# EAGLE board decoder (EAGLE 7.2.0)
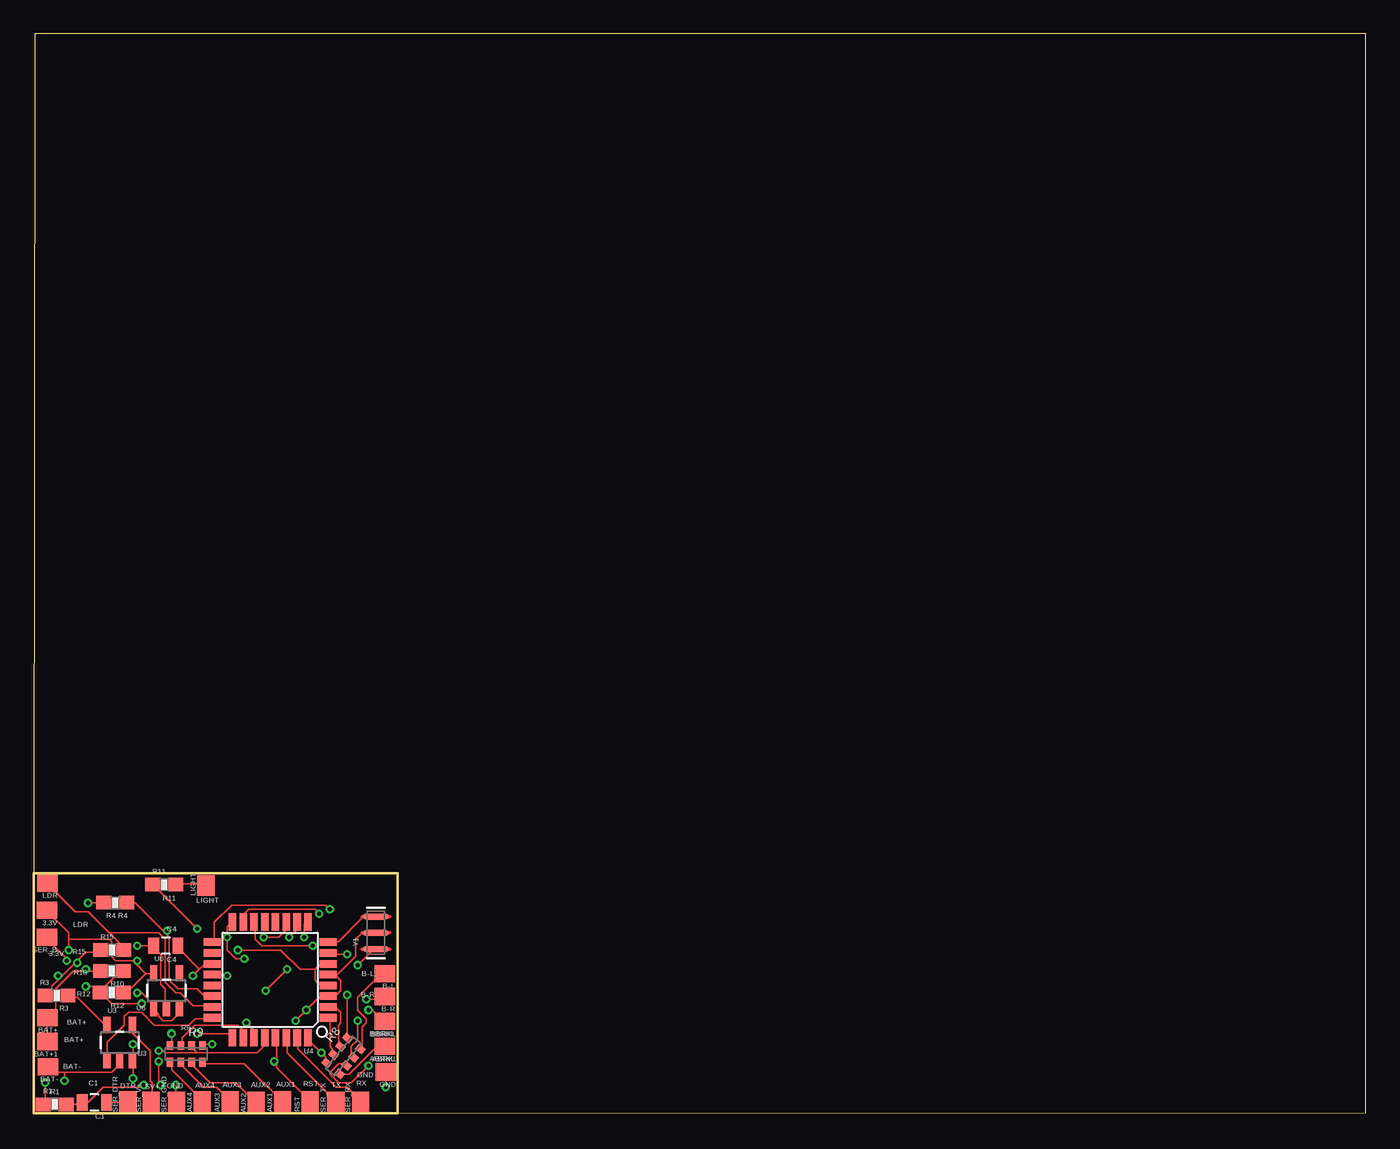
[diagram p0: board, top side]
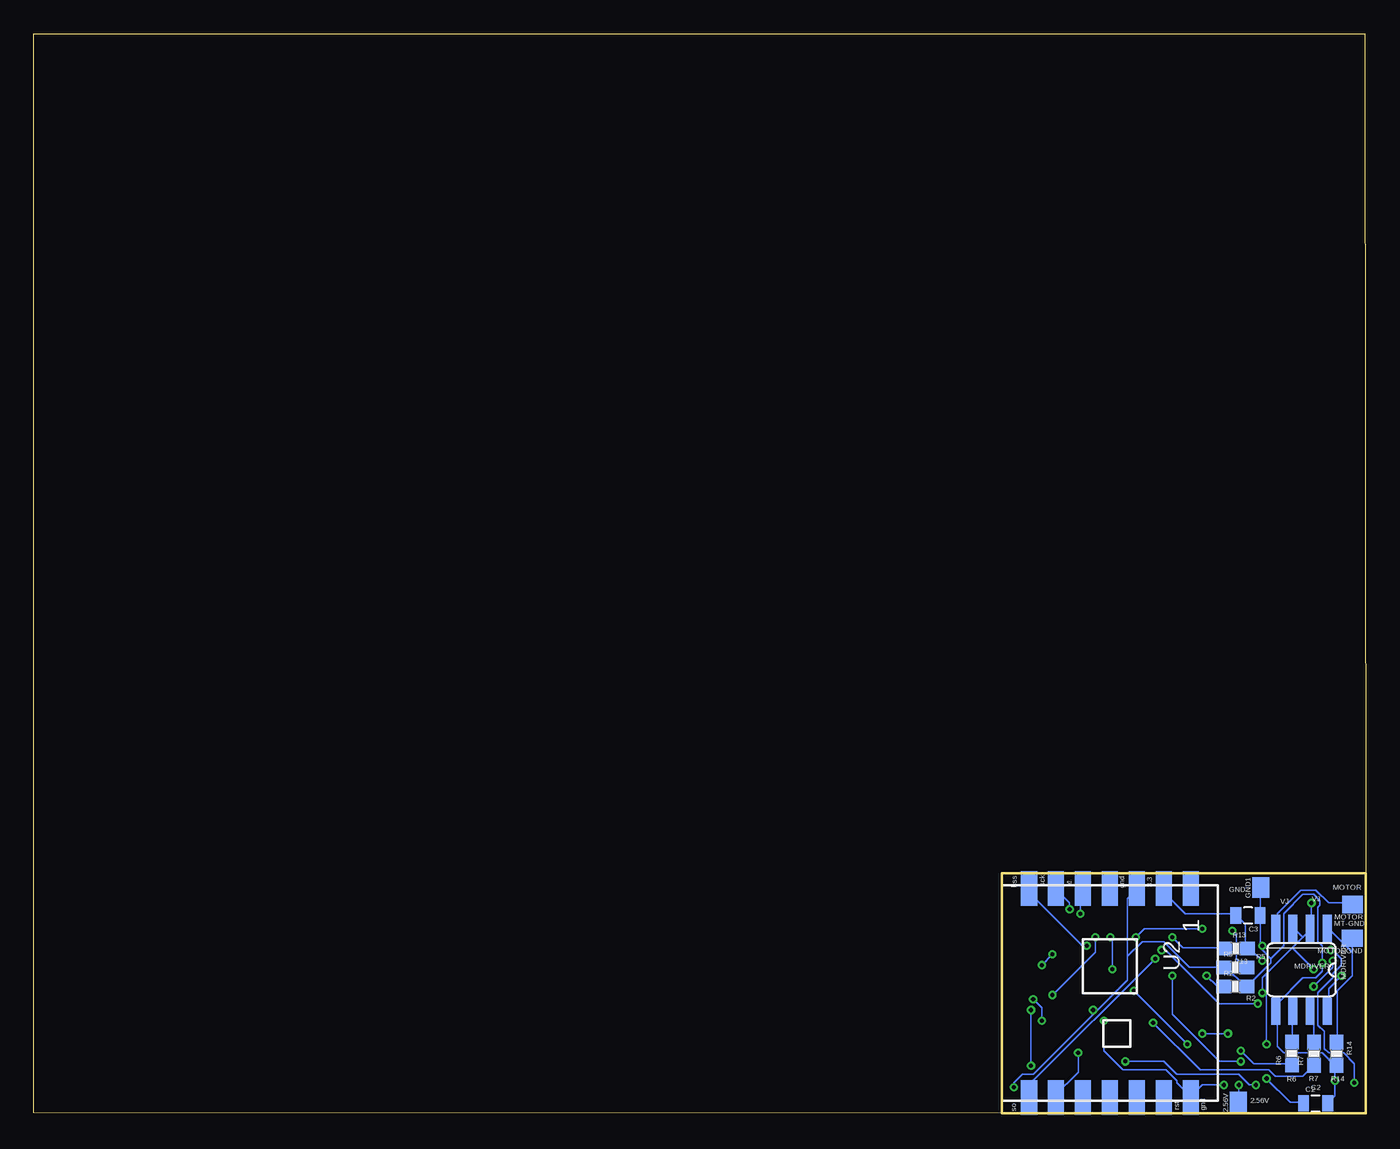
[diagram p1: board, bottom side, seen from below]

Size 98.79 x 80.04 mm. Coordinates in mm from the lower left corner, seen from the top.
Outline: 26.99,0 98.79,0.04 98.79,80.04 0.06,80.04 0.02,17.79
Outline: 0.02,17.79 26.98,17.8 26.99,0
Outline: 26.99,0 0,0.02 0.02,17.79
Copper layers (1*16): Top 0.035mm / dielectric 1.5mm / Bottom 0.035mm
Design rules "Elecrow_2-layer_eagle_rule *": minimum track width 5mil, minimum drill 12mil, track to track 6mil, track to pad 6mil, pad to pad 6mil, via to via 6mil, smd to smd 0mil, copper to edge 10mil, drill to drill 10mil, minimum pad ring 10mil, minimum via ring 6mil, stop-mask expansion 2mil, vias tented up to drill 100mil, thermal gap 10mil

## Footprints (pad centres in the part's own frame; a part is rotated, then mirrored left to right if it is on the bottom)
SMD1,27-2,54 = smd 1.27 x 1.524: 1 0,0
0805 = smd 0.8 x 1.2: 1 -0.9,0; 2 0.9,0
SO08 = smd 0.66 x 2.032: 1 -1.905,-3.073; 2 -0.635,-3.073; 3 0.635,-3.073; 4 1.905,-3.073; 5 1.905,3.073; 6 0.635,3.073; 7 -0.635,3.073; 8 -1.905,3.073
0603-RES = smd 1.1 x 1: 1 -0.85,0; 2 0.85,0
0603-ARV = smd 0.5 x 0.65: 1 -1.2,-0.625; 2 -0.4,-0.625; 3 0.4,-0.625; 4 1.2,-0.625; 5 1.2,0.625; 6 0.4,0.625; 7 -0.4,0.625; 8 -1.2,0.625
RFM69CW-XXXS2 = smd 2.543 x 1.2: 1 -7.754,6; 2 -7.754,4; 3 -7.754,2; 4 -7.754,0; 5 -7.754,-2; 6 -7.754,-4; 7 -7.754,-6; 8 7.754,-6; 9 7.754,-4; 10 7.754,-2; 11 7.754,0; 12 7.754,2; 13 7.754,4; 14 7.754,6
SOT23-5 = smd 0.55 x 1.2: 1 -0.95,-1.3; 2 0,-1.3; 3 0.95,-1.3; 4 0.95,1.3; 5 -0.95,1.3
TQFP32-08 = smd 1.27 x 0.559: 1 -4.293,2.8; 2 -4.293,2; 3 -4.293,1.2; 4 -4.293,0.4; 5 -4.293,-0.4; 6 -4.293,-1.2; 7 -4.293,-2; 8 -4.293,-2.8; 17 4.293,-2.8; 18 4.293,-2; 19 4.293,-1.2; 20 4.293,-0.4; 21 4.293,0.4; 22 4.293,1.2; 23 4.293,2; 24 4.293,2.8 | smd 0.559 x 1.27: 9 -2.8,-4.293; 10 -2,-4.293; 11 -1.2,-4.293; 12 -0.4,-4.293; 13 0.4,-4.293; 14 1.2,-4.293; 15 2,-4.293; 16 2.8,-4.293; 25 2.8,4.293; 26 2,4.293; 27 1.2,4.293; 28 0.4,4.293; 29 -0.4,4.293; 30 -1.2,4.293; 31 -2,4.293; 32 -2.8,4.293
RESONATOR-SMD = smd 0.45 x 1.905: 1 -1.2,0; 2 0,0; 3 1.2,0

## Placement (x,y rotation side)
2.56V  [SMD1,27-2,54]  9.45,0.85 0 bottom
3.3V  [SMD1,27-2,54]  1,15.05 90 top
ABRKL  [SMD1,27-2,54]  26.03,4.97 90 top
AUX1  [SMD1,27-2,54]  18.45,0.87 0 top
AUX2  [SMD1,27-2,54]  16.5,0.83 0 top
AUX3  [SMD1,27-2,54]  14.56,0.87 0 top
AUX4  [SMD1,27-2,54]  12.51,0.87 0 top
B-L  [SMD1,27-2,54]  26.04,10.35 90 top
B-R  [SMD1,27-2,54]  26.04,8.67 90 top
BAT+  [SMD1,27-2,54]  1.03,7.1 90 top
BAT+1  [SMD1,27-2,54]  1.02,5.33 90 top
BAT-  [SMD1,27-2,54]  1.07,3.46 90 top
BBRKL  [SMD1,27-2,54]  26.04,6.83 90 top
C1  0.1uF  [0805]  4.5,0.8 180 top
C2  4.7uF  [0805]  3.72,0.74 0 bottom
C3  4.7uF  [0805]  8.74,14.67 180 bottom
C4  4.7uF  [0805]  9.8,12.42 180 top
GND  [SMD1,27-2,54]  26.1,3.06 90 top
GND1  [SMD1,27-2,54]  7.79,16.73 0 bottom
LDR  [SMD1,27-2,54]  1.01,17.08 90 top
LIGHT  [SMD1,27-2,54]  12.77,16.89 0 top
MDRIVER  L9110S  [SO08]  4.77,10.64 180 bottom
MOTOR  [SMD1,27-2,54]  0.97,15.49 90 bottom
MOTORGND  [SMD1,27-2,54]  1,12.97 90 bottom
R1  10k  [0603-RES]  1.56,0.68 0 top
R2  2k2  [0603-RES]  9.67,9.4 0 bottom
R3  2K  [0603-RES]  1.7,8.74 180 top
R4  2K  [0603-RES]  6.04,15.62 180 top
R5  2K  [0603-RES]  9.67,10.82 0 bottom
R6  0  [0603-RES]  5.48,4.44 90 bottom
R7  0  [0603-RES]  3.85,4.43 90 bottom
R8  100  [0603-ARV]  22.98,4.25 230 top
R9  100  [0603-ARV]  11.31,4.41 180 top
R10  0  [0603-RES]  5.8,10.56 180 top
R11  68  [0603-RES]  9.67,16.96 0 top
R12  0  [0603-RES]  5.79,8.95 180 top
R13  10k  [0603-RES]  9.65,12.23 180 bottom
R14  0  [0603-RES]  2.17,4.42 270 bottom
R15  68  [0603-RES]  5.82,12.11 0 top
RST  [SMD1,27-2,54]  20.49,0.88 0 top
SER_B  [SMD1,27-2,54]  0.98,13.05 90 top
SER_DTR  [SMD1,27-2,54]  6.99,0.88 0 top
SER_GND  [SMD1,27-2,54]  10.61,0.85 0 top
SER_RX  [SMD1,27-2,54]  24.24,0.85 0 top
SER_TX  [SMD1,27-2,54]  22.41,0.85 0 top
SER_V+  [SMD1,27-2,54]  8.72,0.85 0 top
U2  RFM69CW  [RFM69CW-XXXS2]  18.97,8.92 270 bottom
U3  MCP73831  [SOT23-5]  6.38,5.25 0 top
U4  ATMEGA328P  [TQFP32-08]  17.54,9.89 180 top
U6  MIC5219 3.3V  [SOT23-5]  9.85,9.1 0 top
Y1  16MHZ  [RESONATOR-SMD]  25.37,13.38 90 top

## Library data of the parts
2.56V 3.3V ABRKL AUX1-AUX4 B-L B-R BAT+ BAT+1 BAT- BBRKL GND GND1 LDR LIGHT MOTOR MOTORGND RST SER_B SER_DTR SER_GND SER_RX SER_TX SER_V+ = wirepad
C1-C4 = SparkFun-Capacitors
MDRIVER = h-bridge-l9119s
R1-R15 = SparkFun-Resistors
U2 = SparkFun-RF
U3 = SparkFun-PowerIC; PROD_ID: IC-09995
U4 = SparkFun-DigitalIC; PROD_ID: IC-09069
U6 = SparkFun-PowerIC; PROD_ID: VREG-09872
Y1 = SparkFun-FreqCtrl; PROD_ID: XTAL-08900

## Nets
A0: LDR.1 R15.2 U4.23
A1: U3.1 U4.24
A2: R9.4 U4.25
A3: R9.3 U4.26
A4: R7.1 U4.27
A5: R6.1 R9.2 U4.28
A6: C4.1 R2.1 U4.19
A7: R4.1 R5.2 U4.22
ABRKL: R8.4 U2.9 U4.32
AREF: 2.56V.1 U4.20
BAT+: BAT+1.1 BAT+.1 C2.1 MDRIVER.2 MDRIVER.3 R4.2 R10.2 U3.3 U6.1 U6.3
BBRKL: R8.3 U4.1
BL: R8.1 U4.9
BR: R8.2 U4.2
D6: R9.1 U4.10
D7: R11.1 U4.11
GND: BAT-.1 C2.2 C3.1 C4.2 GND1.1 GND.1 MDRIVER.5 MDRIVER.8 R2.2 R3.2 R5.1 R14.2 R15.1 SER_GND.1 U2.3 U2.14 U3.2 U4.3 U4.5 U6.2 Y1.2
MISO: R13.2 U2.8 U4.16
MOSI: U2.5 U4.15
N$2: U4.7 Y1.1
N$3: C1.1 SER_DTR.1
N$4: U4.8 Y1.3
N$5: C1.2 R1.2 RST.1 U4.29
N$6: MDRIVER.6 R6.2
N$7: MDRIVER.7 R7.2
N$8: R10.1 R12.2 SER_B.1 U4.4 U4.6
N$9: SER_V+.1 U3.4
N$11: R3.1 U3.5
N$12: LIGHT.1 R11.2
N$13: B-L.1 R8.8
N$16: B-R.1 R8.7
N$18: BBRKL.1 R8.6
N$20: ABRKL.1 R8.5
N$21: AUX1.1 R9.8
N$22: AUX2.1 R9.7
N$23: AUX3.1 R9.6
N$24: AUX4.1 R9.5
OA: MDRIVER.1 MOTORGND.1 R14.1
OB: MDRIVER.4 MOTOR.1
RX: SER_TX.1 U4.30
SCK: U2.6 U4.17
SS: U2.7 U4.14
TX: SER_RX.1 U4.31
VCC: 3.3V.1 C3.2 R1.1 R12.1 R13.1 U2.2 U6.5

## Tracks (layer width: path | path; a pad name or v marks a point on that pad's centre or on a via)
A0
  Top 0.127: 5.62,13.38 4.03,14.96 3.08,14.96 1.01,17.03 LDR.1 | 5.62,13.38 6.57,12.43 6.57,12.11 R15.2 | 5.62,13.38 9.27,13.38 9.75,12.9 9.75,9.73 10.54,8.93 10.86,8.93 11.81,7.98 13.24,7.98 U4.23
A1
  Top 0.127: U3.1 5.46,4.01 5.46,5.28 6.73,6.55 6.73,7.19 7.05,7.5 8,7.5 8.95,6.55 11.49,6.55 11.97,7.03 13.24,7.03 U4.24
A2  (via drill 0.3)
  Top 0.127: v10.22,5.92 10.22,5.12 R9.4 | v12.13,5.92 14.51,5.92 14.67,5.76 U4.25
  Bottom 0.127: v12.13,5.92 v10.22,5.92
A3
  Top 0.127: R9.3 11.02,5.12 11.02,5.6 11.97,6.55 15.14,6.55 15.46,6.23 15.46,5.76 U4.26
A4  (via drill 0.3)
  Top 0.127: v15.78,6.71 16.25,6.23 16.25,5.76 U4.27
  Bottom 0.127: v15.78,6.71 12.29,3.22 7.21,3.22 6.73,2.74 4.67,2.74 3.87,3.54 R7.1
A5  (via drill 0.3)
  Top 0.127: 12.13,4.49 11.81,4.81 11.81,4.96 R9.2 | 12.13,4.49 16.57,4.49 17.05,4.96 17.05,5.6 U4.28 | v9.27,4.65 9.59,4.65 9.75,4.49 12.13,4.49
  Bottom 0.127: v9.27,4.65 8.32,3.69 5.62,3.69 R6.1
A6  (via drill 0.3)
  Top 0.127: 12.29,10.68 12.6,11 13.24,11 U4.19 | 12.29,10.68 v11.81,10.2 | 12.29,10.68 10.7,12.27 C4.1
  Bottom 0.127: v11.81,10.2 11.02,9.41 10.54,9.41 R2.1
A7  (via drill 0.3)
  Top 0.127: 9.75,13.38 10.06,13.06 10.06,9.88 10.7,9.25 12.13,9.25 12.6,8.77 13.24,8.77 U4.22 | 9.75,13.38 7.52,15.6 7.05,15.6 R4.1 | 9.75,13.38 v9.9,13.54
  Bottom 0.127: v9.9,13.54 9.59,13.22 9.59,11.47 8.95,10.84 R5.2
ABRKL  (via drill 0.3)
  Top 0.127: R8.4 21.65,3.85 21.65,4.17 v21.33,4.49 20.22,5.6 U4.32
  Bottom 0.127: v21.33,4.49 21.33,3.06 23.08,1.31 U2.9
AREF  (via drill 0.3)
  Top 0.127: v14.35,10.2 13.4,10.2 U4.20 | v9.27,3.85 9.27,2.27 v9.43,2.11
  Bottom 0.127: v14.35,10.2 14.35,7.35 10.86,3.85 v9.27,3.85 | v9.43,2.11 9.43,1 2.56V.1
BAT+  (via drill 0.3)
  Top 0.127: 3.87,10.52 2.92,10.52 1.65,9.25 1.65,7.66 1.17,7.19 BAT+.1 1.01,7.03 1.01,5.44 BAT+1.1 | 3.87,10.52 4.82,10.52 R10.2 | v7.36,2.58 7.36,3.85 U3.3 7.36,4.01 v7.36,5.12 | U6.3 10.7,7.66 10.7,7.35 10.22,6.87 9.59,6.87 9.27,7.19 9.27,7.35 8.95,7.66 U6.1 8.79,7.82 8.79,8.14 8,8.93 v7.68,8.93 | v4.03,15.6 5.14,15.6 R4.2 | v3.87,10.68 3.87,10.52
  Bottom 0.127: v7.36,2.58 5.62,0.84 4.67,0.84 C2.1 | v4.03,15.6 4.03,13.85 MDRIVER.2 4.03,13.69 4.67,13.06 | v7.68,8.93 7.68,10.04 7.36,10.36 | 4.67,13.06 5.46,12.27 | 5.46,12.27 7.36,10.36 | 4.67,13.06 5.3,13.69 MDRIVER.3 | 7.36,10.36 v7.36,5.12 | 5.46,12.27 v3.87,10.68
BBRKL
  Top 0.127: R8.3 22.13,4.49 22.13,4.81 21.97,4.96 21.97,7.03 U4.1
BL  (via drill 0.3)
  Top 0.127: v23.24,8.77 23.24,5.6 R8.1 | v20.06,13.06 20.06,14.01 20.22,14.17 U4.9
  Bottom 0.127: v23.24,8.77 20.06,11.95 v20.06,13.06
BR
  Top 0.127: R8.2 22.6,4.96 22.6,6.55 22.76,6.71 22.76,7.5 22.45,7.82 21.97,7.82 U4.2
D6  (via drill 0.3)
  Top 0.127: v13.24,5.12 12.6,5.12 R9.1 | v18.79,10.68 v17.21,9.09 | v18.95,13.06 19.43,13.54 19.43,14.17 U4.10
  Bottom 0.127: v17.21,9.09 v13.24,5.12 | v18.79,10.68 18.79,12.9 v18.95,13.06
D7  (via drill 0.3)
  Top 0.127: v12.13,13.69 8.95,16.87 R11.1 | v17.05,13.06 18.16,13.06 18.64,13.54 18.64,14.17 U4.11
  Bottom 0.127: v12.13,13.69 16.41,13.69 v17.05,13.06
GND  (via drill 0.3)
  Top 0.127: v10.54,2.11 10.54,1 SER_GND.1 | 22.45,10.2 22.76,9.88 22.76,9.09 22.45,8.77 21.97,8.77 U4.3 21.81,8.61 21.18,8.61 v20.22,7.66 v19.43,6.87 | 22.45,10.2 21.97,10.2 U4.5 22.45,10.2 | 22.45,10.2 23.87,11.63 23.87,12.9 24.35,13.38 | 3.08,11.16 3.87,11.95 4.82,11.95 R15.1 | 3.08,11.16 1.97,10.04 | 1.97,10.04 1.33,9.41 1.33,9.25 0.86,8.77 R3.2 | 1.97,10.04 v1.81,10.2 | 2.28,3.06 1.49,3.06 1.17,3.38 BAT-.1 | 2.28,3.06 5.78,3.06 6.25,3.54 6.25,3.85 U3.2 | v2.28,2.42 2.28,3.06 | v3.24,11.16 3.08,11.16 | U6.2 9.75,7.82 9.75,9.25 9.43,9.57 9.43,11.79 8.95,12.27 C4.2 8.79,12.43 v7.68,12.43 | v26.1,1.95 GND.1
  Bottom 0.127: v10.54,2.11 12.13,2.11 12.92,1.31 U2.14 13.08,1.31 14.03,2.27 14.03,2.42 14.83,3.22 18,3.22 19.43,4.65 v19.43,6.87 | v1.81,10.2 2.76,9.25 2.76,7.66 MDRIVER.8 | 2.28,3.54 v2.28,2.42 2.28,1.31 2.76,0.84 C2.2 | 2.28,3.54 3.24,4.49 6.09,4.49 6.57,4.96 6.57,7.5 MDRIVER.5 6.57,7.66 6.57,8.14 4.67,10.04 3.71,10.04 3.24,10.52 v3.24,11.16 3.24,12.43 3.55,12.74 3.55,15.28 3.4,15.44 3.4,15.76 3.87,16.23 4.67,16.23 6.09,14.81 6.09,12.43 7.05,11.47 | 2.28,3.54 R14.2 | GND1.1 7.84,16.71 7.84,14.81 C3.1 7.84,14.65 7.84,12.43 | 7.84,12.43 7.84,12.27 7.05,11.47 | 7.05,11.47 7.05,11.16 8.79,9.41 R2.2 8.95,9.41 10.38,10.84 R5.1 10.54,10.84 13.08,10.84 14.98,12.74 16.57,12.74 17.68,11.63 | 7.84,12.43 v7.68,12.43 | v26.1,1.95 26.1,2.27 25.46,2.9 24.67,2.9 20.06,7.5 | 20.06,7.5 17.68,9.88 17.68,11.63 | 17.68,11.63 17.68,15.92 17.05,16.55 U2.3 | 20.06,7.5 v20.22,7.66
MISO  (via drill 0.3)
  Top 0.127: U4.16 14.67,14.17 14.35,13.85 v14.35,13.06 14.35,12.11 14.98,11.47 v15.62,11.47
  Bottom 0.127: v14.35,13.06 13.56,12.27 10.54,12.27 R13.2 | v15.62,11.47 24.83,2.27 24.83,1.31 U2.8
MOSI  (via drill 0.3)
  Top 0.127: v21.18,14.81 20.86,15.12 15.94,15.12 15.62,14.81 15.62,14.33 U4.15
  Bottom 0.127: v21.18,14.81 21.18,16.39 21.02,16.55 U2.5
N$2  (via drill 0.3)
  Top 0.127: v23.24,11.79 21.97,11.79 U4.7 | v24.03,11 25.14,12.11 Y1.1
  Bottom 0.127: v24.03,11 v23.24,11.79
N$3
  Top 0.127: C1.1 5.46,0.84 6.89,0.84 SER_DTR.1
N$4
  Top 0.127: U4.8 21.97,12.74 22.6,12.74 24.35,14.49 24.35,14.58
N$5  (via drill 0.3)
  Top 0.127: R1.2 2.44,0.68 3.55,0.68 C1.2 3.71,0.84 4.03,0.84 5.14,1.95 8,1.95 v8.16,2.11 | 18,3.85 18,3.38 20.38,1 RST.1 | 18,3.85 18,5.6 U4.29 | 18,3.85 v17.84,3.85
  Bottom 0.127: v8.16,2.11 8.63,2.11 9.43,2.9 14.03,2.9 14.98,3.85 v17.84,3.85
N$6
  Bottom 0.127: R6.2 5.46,5.44 5.46,7.5 MDRIVER.6
N$7
  Bottom 0.127: R7.2 3.87,5.28 3.87,7.35 4.03,7.5 MDRIVER.7
N$8  (via drill 0.3)
  Top 0.127: 20.86,10.68 20.86,9.88 21.18,9.57 21.81,9.57 U4.4 | 20.86,10.68 21.18,11 21.81,11 U4.6 | 5.3,9.41 6.57,10.68 R10.1 | 5.3,9.41 4.98,9.09 R12.2 | v2.44,11.31 2.44,11.47 1.01,12.9 SER_B.1 | 5.3,9.41 v3.87,9.41 | 5.3,9.41 R12.2 | 20.86,10.68 19.75,10.68 18.32,12.11 v15.14,12.11 | v8,8.14 5.78,8.14 4.98,8.93 R12.2
  Bottom 0.127: v2.44,11.31 2.44,10.84 v3.87,9.41 | v15.14,12.11 14.83,12.11 10.86,8.14 v8,8.14
N$9
  Top 0.127: U3.4 7.36,6.39 7.36,5.92 8.63,4.65 8.63,2.42 8.79,2.27 8.79,1 SER_V+.1
N$11
  Top 0.127: R3.1 2.6,8.61 3.24,8.61 5.3,6.55 U3.5
N$12
  Top 0.127: R11.2 10.54,17.03 12.76,17.03 LIGHT.1
N$13
  Top 0.127: R8.8 24.35,4.81 24.35,6.39 24.67,6.71 24.67,7.03 24.03,7.66 24.03,8.61 25.62,10.2 25.94,10.2 B-L.1
N$16  (via drill 0.3)
  Top 0.127: v24.03,6.87 24.03,5.44 23.56,4.96 23.56,4.17 R8.7 | v24.67,8.46 25.78,8.46 25.94,8.61 B-R.1
  Bottom 0.127: v24.03,6.87 24.03,7.82 v24.67,8.46
N$18  (via drill 0.3)
  Top 0.127: v24.83,3.54 23.56,2.27 22.6,2.27 21.97,2.9 21.97,3.06 22.6,3.69 23.08,3.69 R8.6 | v24.83,7.66 25.14,7.66 25.94,6.87 BBRKL.1
  Bottom 0.127: v24.83,7.66 v24.83,3.54
N$20
  Top 0.127: R8.5 22.76,2.9 23.4,2.9 25.46,4.96 25.94,4.96 ABRKL.1
N$21
  Top 0.127: R9.8 12.6,3.69 15.62,3.69 18.32,1 AUX1.1
N$22
  Top 0.127: R9.7 11.81,3.69 11.81,3.54 13.08,2.27 14.98,2.27 16.41,0.84 AUX2.1
N$23
  Top 0.127: R9.6 11.02,3.69 11.02,3.54 12.6,1.95 13.56,1.95 14.51,1 AUX3.1
N$24
  Top 0.127: R9.5 10.22,3.69 10.22,3.22 12.44,1 AUX4.1
OA
  Bottom 0.127: 1.01,11.95 1.01,12.9 MOTORGND.1 | 1.01,11.95 1.01,10.2 2.13,9.09 2.13,5.28 R14.1 | 1.01,11.95 2.76,13.69 MDRIVER.1
OB
  Bottom 0.127: MOTOR.1 1.01,15.6 2.76,15.6 3.71,16.55 4.82,16.55 6.57,14.81 6.57,13.85 MDRIVER.4
RX
  Top 0.127: U4.30 18.79,5.6 18.79,4.49 22.29,1 SER_TX.1
SCK  (via drill 0.3)
  Top 0.127: v21.97,15.12 21.65,15.44 14.67,15.44 13.4,14.17 13.4,12.74 U4.17
  Bottom 0.127: v21.97,15.12 21.97,15.6 22.92,16.55 U2.6
SS  (via drill 0.3)
  Top 0.127: v20.7,12.43 16.89,12.43 16.41,12.9 16.41,14.17 U4.14
  Bottom 0.127: v20.7,12.43 21.02,12.43 24.83,16.23 24.83,16.55 U2.7
TX
  Top 0.127: U4.31 19.59,5.6 19.59,4.81 22.45,1.95 23.24,1.95 24.19,1 SER_RX.1
VCC  (via drill 0.3)
  Top 0.127: 8.32,10.36 7.05,9.09 6.73,9.09 R12.1 | 8.32,10.36 8.79,10.36 U6.5 | v0.86,2.27 0.86,0.68 R1.1 | 2.6,12.9 2.6,13.38 1.01,14.96 3.3V.1 | 2.6,12.9 v2.6,12.11 | 7.52,11.16 7.36,11.31 6.09,11.31 5.78,11.63 5.78,12.74 5.62,12.9 2.6,12.9 | 7.52,11.16 8.32,10.36 | 7.52,11.16 v7.68,11.31
  Bottom 0.127: U2.2 14.83,16.55 14.83,16.23 13.4,14.81 9.75,14.81 C3.2 9.59,14.65 8.95,14.01 8.95,12.27 R13.1 8.79,12.11 8.48,12.11 v7.68,11.31 | v0.86,2.27 0.86,3.69 1.65,4.49 2.76,4.49 3.08,4.81 3.08,6.07 3.55,6.55 3.55,8.93 2.44,10.04 2.44,10.36 1.81,11 1.81,11.47 2.44,12.11 v2.6,12.11

## Text on the board
_tsilk: R11 | LIGHT | LDR | R4 | C4 | 3.3V | R15 | R10 | B-L | R3 | R12 | B-R | U6 | BAT+ | R9 | BBRKL | BAT+ | U3 | ABRKL | BAT- | GND | C1 | DTR | SV+ | GND | AUX4 | AUX3 | AUX2 | AUX1 | RST | TX | RX | R1
_bsilk: 3.3 | gnd | si | sck | hss | MOTOR | VJ | GND | VJ | MT-GND | R13 | MDRIVER | R5 | R2 | R14 | C2 | R7 | R6 | 2.56V | so | gnd | rst